# Altium PCB RV09-S_v2_PCB.PcbDoc
Units mm, origin at the board's own origin, x right, y up, seen from the top; angles counter-clockwise.
Board outline 22.5 x 38.5 mm, 2 copper layers (Top Layer, Bottom Layer), stack 1.571 mm thick; 10 components, 7 nets, 32 pads, 1 vias.
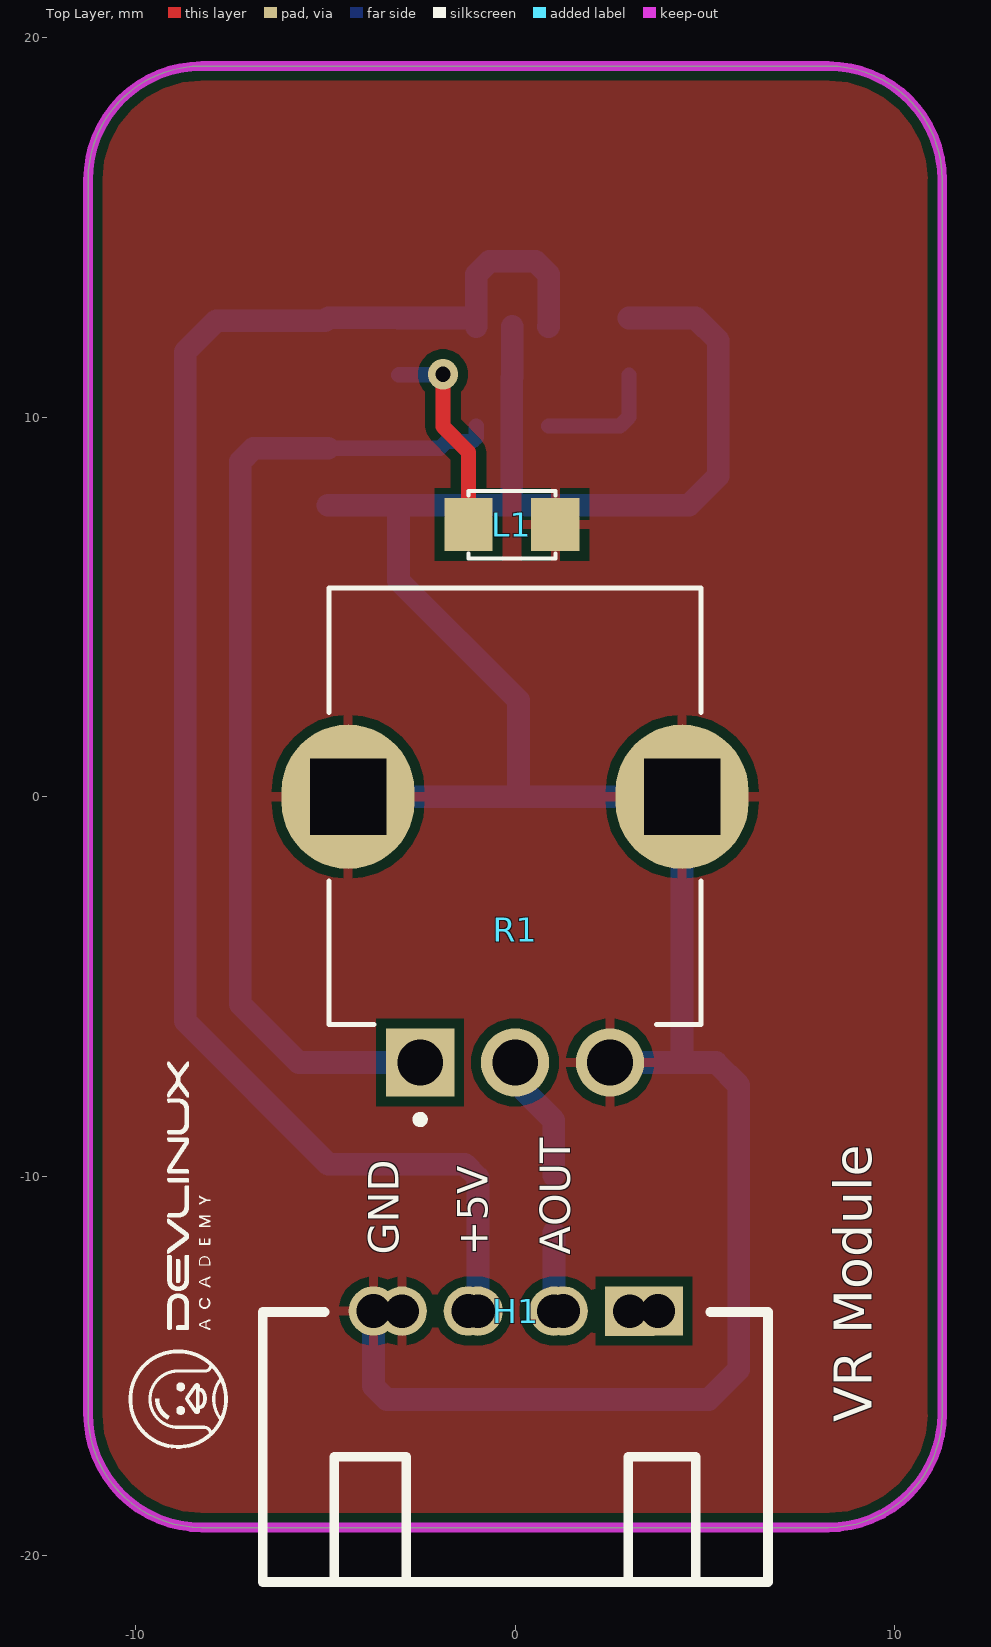
[diagram p0: Top Layer view]
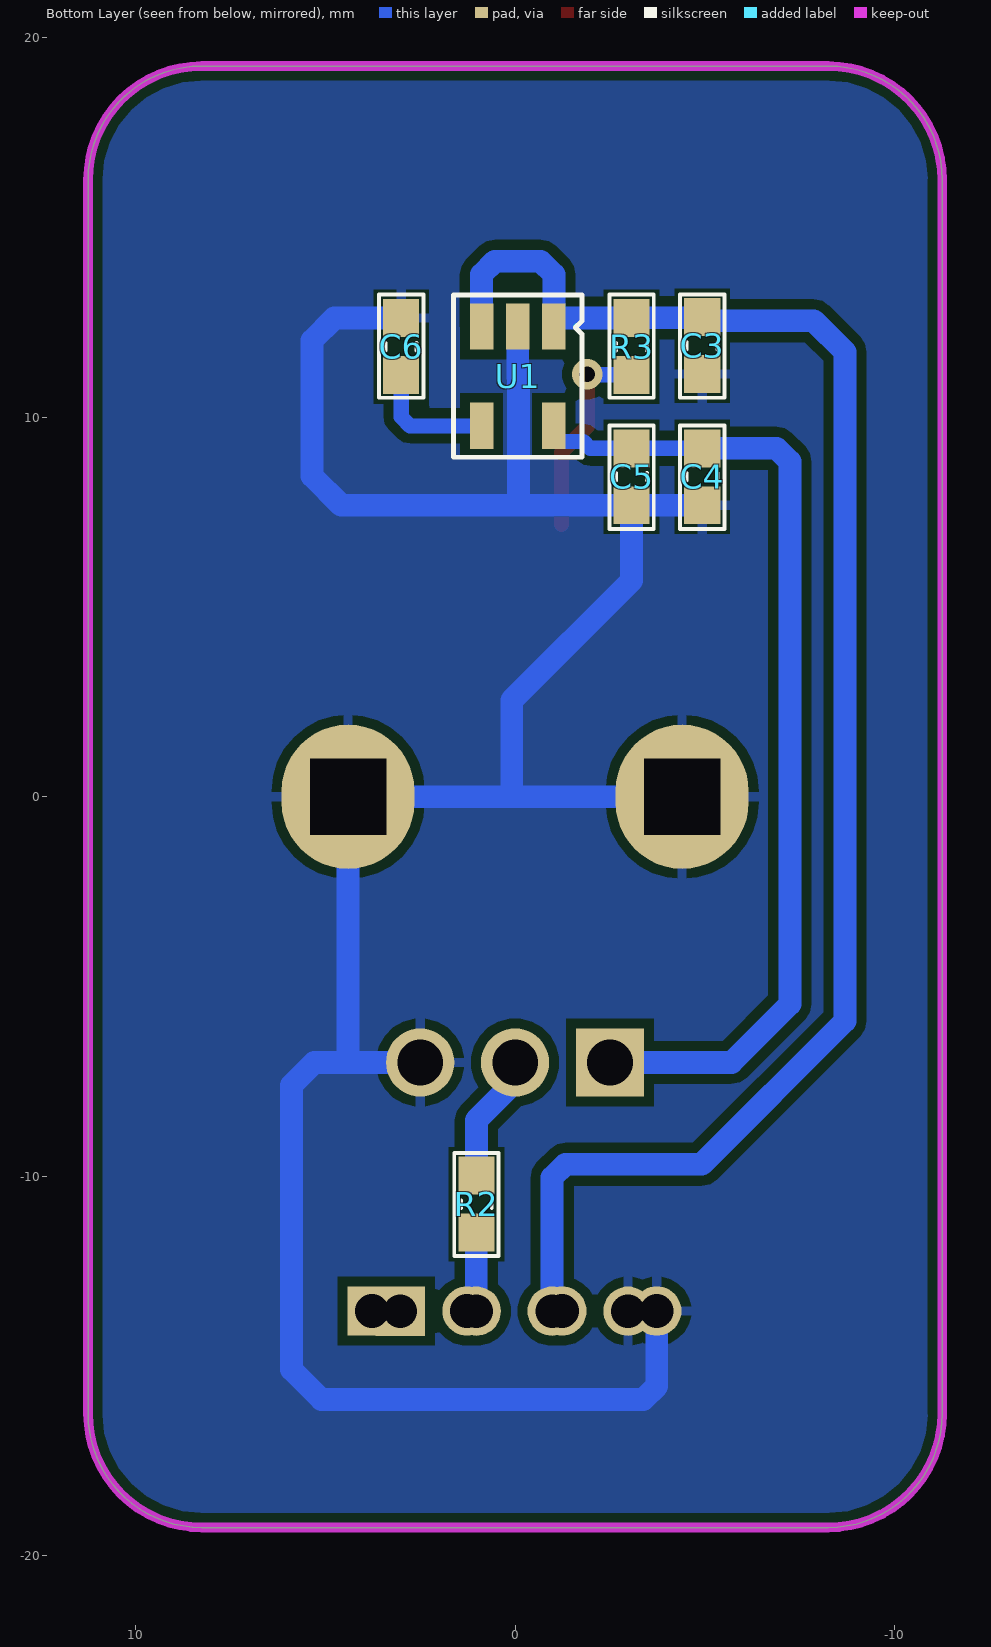
[diagram p1: Bottom Layer view, seen from below]
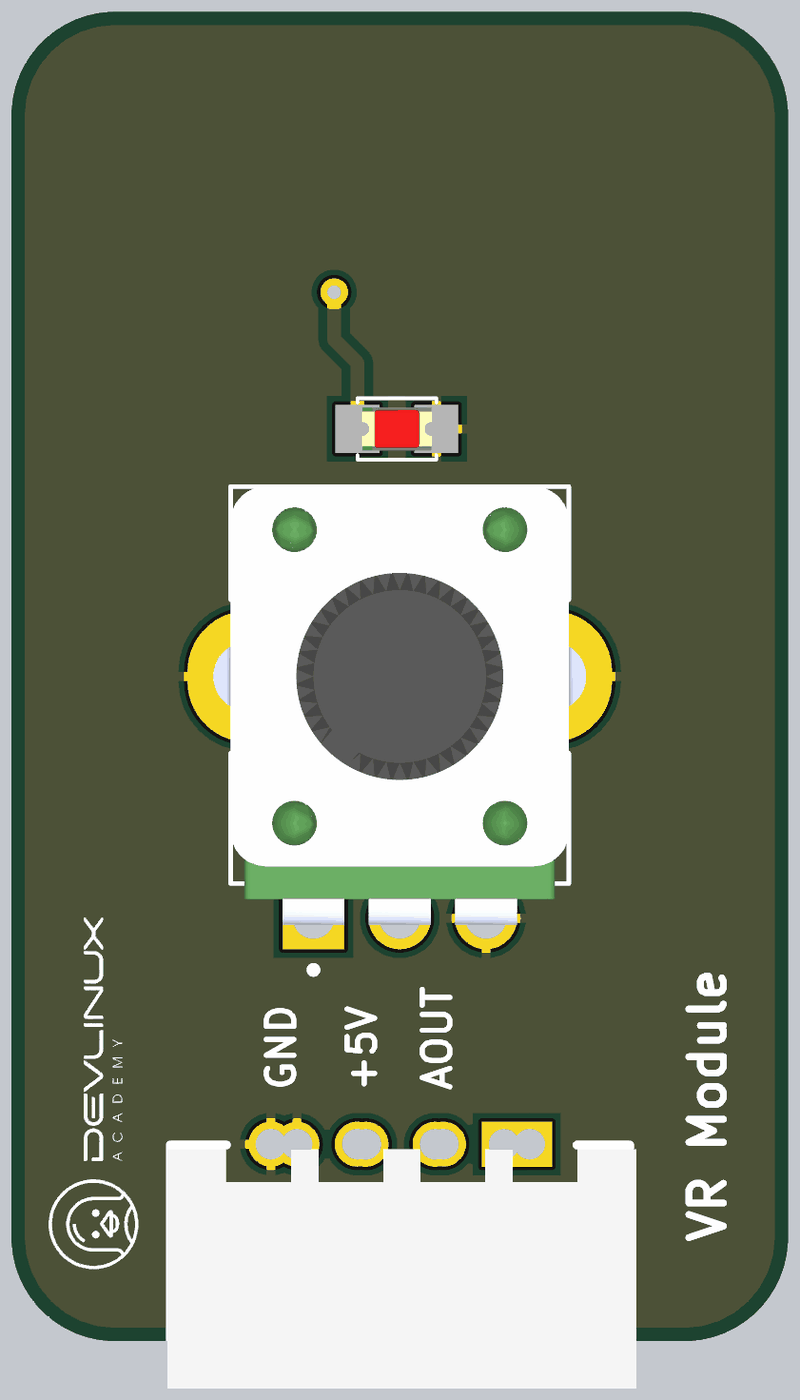
[diagram p2: 3D render of the assembled board from above, using the file's embedded part models]
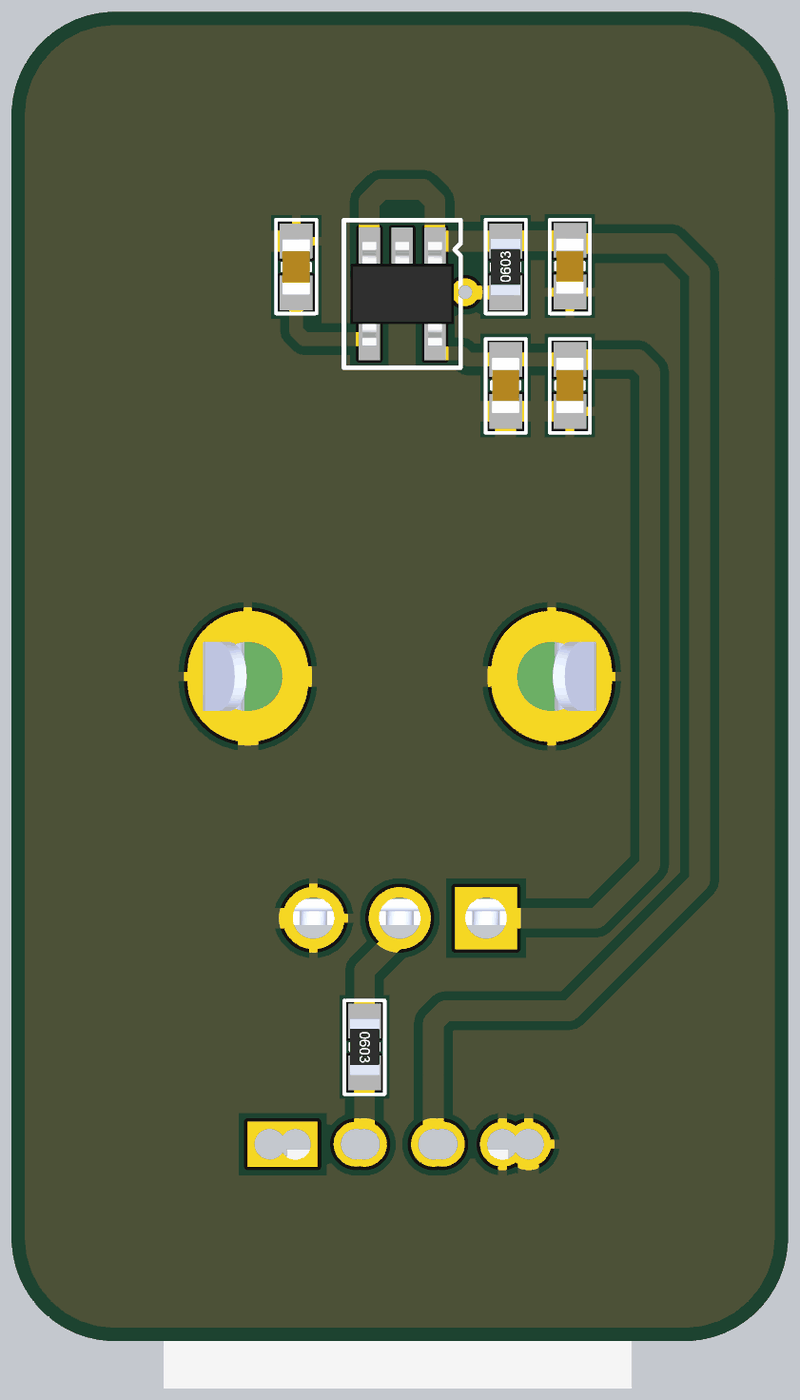
[diagram p3: 3D render of the assembled board from below, using the file's embedded part models]

## Layer stack, top to bottom
Top Solder: solder mask 0.0102, Solder Resist, Dk 3.5
Top Layer: signal copper 0.0356
Dielectric 1: dielectric 1.5, FR-4, Dk 4.8
Bottom Layer: signal copper 0.0356
Bottom Solder: solder mask 0.0102, Solder Resist, Dk 3.5

## Board outline
-11.25,-16.25 -11.25,16.25 cw(c-8.25,16.25) -8.25,19.25 8.25,19.25 cw(c8.25,16.25) 11.25,16.25 11.25,-16.25 cw(c8.25,-16.25) 8.25,-19.25 -8.25,-19.25 cw(c-8.25,-16.25)

## Design rules (kind name [scope] priority, off if disabled: settings)
Clearance [All] p1: gap=0.254 ignorepadtopadclearanceinfootprint=FALSE except(0: Arc-Hole Track-Hole SMDPad-Hole THPad-Hole Via-Hole Fill-Hole Poly-Hole Region-Hole Text-Hole)
PolygonConnect [All] p1: connectstyle=Relief reliefconductorwidth=0.254 reliefentries=4 polygonreliefangle="90 Angle" airgapwidth=0.254
RoomDefinition RV09-S_v2_SCH [InComponentClass('RV09-S_v2_SCH')] p1: confinementstyle=ConfineIn formatcopy=TRUE lockcomponents=FALSE outline 12.929,-48.97 57.125,-48.97 57.125,-17.855 12.929,-17.855
RoutingVias [All] p1: holewidth=0.4 width=0.8 viastyle="Through Hole" minholewidth=0.3 minwidth=0.6 maxholewidth=0.5 maxwidth=1
SolderMaskExpansion [All] p1: expansion=0.102 istentingtop=FALSE
Width [All] p1: maxlimit=0.6 minlimit=0.254 preferedwidth=0.4
30 further rules are at their usual default settings.

## Components (designator, comment, footprint, x,y, rotation, side; value= is the part's Value field where it differs from the comment)
C3 "100nF" "tu 0603" -4.93,11.884 r270 bottom
C4 "10uF" "tu 0603" -4.93,8.43 r270 bottom
C5 "100nF" "tu 0603" -3.07,8.43 r270 bottom
C6 "22nF" "tu 0603" 3,11.859 r90 bottom
H1 "Header 4P 2.54 + 2.0 Duc Cong" "Header 4P DC 2.54 + 2.0" 3.742,-13.572 r270 top
L1 "LED RED" LED-0805-Red -1.226,7.17 r0 top
R1 "RV09-S 10k" TRIM_RV09AF-40-20K-A10K 0,0 r0 top
R2 "1K" "tro smd 0603" 1.02,-10.73 r270 bottom
R3 "1k" "tro smd 0603" -3.07,11.859 r90 bottom
U1 "RT9193-33GB" SOT23-5 -0.07,11.08 r0 bottom

## Footprints (in the part's own frame and the unit in brackets; to place one, negate y for a bottom-side part, rotate by r counter-clockwise, add the part's x,y. Pads: shape width x height; smd on the part's side, far side on the other; paste and mask are expansions set on the pad)
"Header 4P DC 2.54 + 2.0" [mm]
  rect 1.3x1.3 hole 0.889: 1(-0.025,0.025) 1(-0.022,-0.719)
  round 1.3 hole 0.889: 2(-0.025,-2.475) 2(-0.022,-2.719) 3(-0.025,-4.975) 3(-0.022,-4.719) 4(-0.025,-7.475) 4(-0.022,-6.718)
  silkscreen extent 0,-10.39 7.11,2.92, body extent 0.13,-10.48 7.06,3.11, height 7.38
LED-0805-Red [mil]
  rect 50x55 smd: 1(0,0) 2(90,0)
  silkscreen extent 0,-35 90,35, body extent 5,-25 85,25, height 43
SOT23-5 [mm] "CASE: SOT"
  rect 0.62x1.22 smd mask+0.076: 1(-0.953,-1.31) 2(-0.003,-1.31) 3(0.947,-1.31) 4(0.952,1.31) 5(-0.953,1.31)
  silkscreen extent -1.69,-2.14 1.69,2.14, body extent -1.5,-1.5 1.5,1.5, height 1.41
TRIM_RV09AF-40-20K-A10K [mm]
  rect 1.8x1.8 / inner round 1.8 / far side rect 1.8x1.8 hole 1.2: 1(-2.5,-7)
  round 1.8 hole 1.2: 2(0,-7) 3(2.5,-7)
  oval 3.5x3.8 hole 2 square: SH1(-4.4,0) SH2(4.4,0)
  silkscreen extent -4.9,-8.6 4.9,5.5, body extent -5.7,-7.2 5.7,5.5, height 20
"tro smd 0603" [mm] "Chip Capacitor, 2-Leads, Body 1,60x0,80mm, IPC Medium Density"
  rect 1x0.95 smd mask+0.076: 1(-0.75,0) 2(0.75,0)
  silkscreen extent -1.35,-0.58 1.37,0.58, body extent -0.82,-0.42 0.82,0.43, height 0.44
"tu 0603" [mm] "Chip Capacitor, 2-Leads, Body 1,60x0,80mm, IPC Medium Density"
  rect 1x0.95 smd mask+0.076: 1(-0.75,0) 2(0.75,0)
  silkscreen extent -1.35,-0.58 1.37,0.58, body extent -0.8,-0.4 0.8,0.4, height 0.9

## Part data
C3 C5 C6: library part "Tu 0603 104 50V 10%", "Dán", Chung_Loai=Dán, Don_Vi=Con, Ma_Hang=MH004568, So_Chan=2, Ten_Linh_Kien="Tụ 0603 104-100nF 10% 50V"
C4: library part "Tu 0603 106 16V 20%", "Dán", Chung_Loai=Dán, Don_Vi=Con, Ma_Hang=MH004848, So_Chan=2, Ten_Linh_Kien="Tụ 0603-10uF 20% 16V"
H1: "Cắm", Chung_Loai=Cắm, Don_Vi=Con, Ma_Hang=MH001310, Ten_Linh_Kien="Header 4P XH2.54-4P Đực Cong"
L1: library part "LED 0805 Do", "Dán", Chung_Loai=Dán, Don_Vi=Con, Ma_Hang=MH000897, Ten_Linh_Kien="LED 0805 Màu Đỏ (Red)"
R1: Package=None, Check_prices=https://www.snapeda.com/parts/RV09AF-40-20K-A10K/Alpha/view-part/?ref=eda, MF="Alpha Taiwan", MP=RV09AF-40-20K-A10K, SnapEDA_Link=https://www.snapeda.com/parts/RV09AF-40-20K-A10K/Alpha/view-part/?ref=snap
R2: library part "Tro 0603 1% 10k", "Dán", Chung_Loai=Dán, Don_Vi=Con, Ma_Hang=MH006333, So_Chan=2, Ten_Linh_Kien="Trở 0603 1% 10k"
R3: library part "Tro 0603 1% 1k", "Dán", Chung_Loai=Dán, Don_Vi=Con, Ma_Hang=MH006334, So_Chan=2, Ten_Linh_Kien="Trở 0603 1% 1k"
U1: library part REG_5.5V-3.3V-0.3A-1W-SOT-23-5, "Linear Voltage Regulator IC 1 Output 300mA SOT-23-5", Alternate Part Number-1=NA, Case/Package=SOT-23-5, Manufacturer="Richtek USA Inc.", Supplier Part Number-1=C15651, Manufacturer Part Number=RT9193-33GB, Supplier-1=LCSC

## Via types
v1: diameter 0.8, hole 0.4, Top Layer to Bottom Layer, 1 vias

## Nets (pads, with @x,y where several pads share a name; then routed paths per layer and width w, separated by ;. In a path a pad name is that pad's centre, name@x,y a point inside that pad or via, vN(x,y) a via of type N, cw(c..) or ccw(c..) an arc to the next point about the centre after c; other vN are vias at no path point)
+3V3: C4.1 C5.1 R1.1 U1.5 | length 26.4
  Bottom Layer w0.4: C4.1 C5.1 -1.98,9.18 -1.8,9.36 -1.133,9.36 -1.023,9.47 U1.5
  Bottom Layer w0.6: C4.1 -6.889,9.18 -7.24,8.829 -7.24,-5.46 -5.7,-7 R1.1
+5: C3.1 H1.3 R3.2 U1.1 U1.3 | length 43.6
  Bottom Layer w0.6: U1.1 U1.1@-1.023,12.599 ; H1.3@-0.974,-13.553 -0.974,-10.031 -1.326,-9.68 -4.92,-9.68 -8.69,-5.91 -8.69,11.72 -7.87,12.54 -4.999,12.54 -4.917,12.621 -3.083,12.621 R3.2 -1.033,12.609 U1.1@-1.023,12.599 ; U1.3 0.887,12.4 0.887,13.759 0.536,14.11 -0.671,14.11 -1.023,13.759 U1.1@-1.023,12.599
A_OUT: H1.2 R2.2 | length 2.1
  Bottom Layer w0.6: R2.2 1.023,-11.483 1.023,-13.55 H1.2@1.026,-13.553
GND: C3.2 C4.2 C5.2 C6.2 H1.4 L1.2 R1.3 R1.SH1 R1.SH2 U1.2 | length 70.3
  Bottom Layer w0.6: C4.2 C5.2 ; R1.SH1 0,0 ; H1.4@-2.974,-13.553 -3.73,-13.553 -3.73,-15.529 -3.379,-15.88 5.1,-15.88 5.89,-15.09 5.89,-7.6 5.29,-7 4.4,-7 ; U1.2 -0.073,11.057 -0.09,11.04 -0.09,7.73 -0.14,7.68 ; R1.3 4.4,-7 ; C6.2 4.761,12.609 5.35,12.02 5.35,8.45 4.58,7.68 -0.14,7.68 ; C5.2 -0.14,7.68 ; C5.2 -3.07,5.7 0.09,2.54 0.09,0.09 0,0 ; 0,0 R1.SH2 4.4,-7
NetC6_1: C6.1 U1.4 | length 3.3
  Bottom Layer w0.4: U1.4 2.766,9.77 3,10.004 C6.1
NetL1_1: L1.1 R3.1 | length 5.4
  Top Layer w0.4: v1(-1.9,11.13) -1.9,9.75 -1.226,9.076 L1.1
  Bottom Layer w0.4: R3.1 -3.059,11.119 -1.911,11.119 v1(-1.9,11.13)
NetR1_2: R1.2 R2.1 | length 3.4
  Bottom Layer w0.6: R1.2 0.23,-7.23 0.23,-7.73 1.02,-8.52 R2.1
pads on no net: H1.1

## Polygon pours and split planes (outlines as drawn)
GND on Top Layer "NONET_L-01_P-001" (solid, remove dead copper, pour order 0): -11.58,21.08 -11.37,21.29 12.74,21.29 12.74,-21.46 11.84,-22.36 10.72,-21.24 -13.45,-21.24
GND on Bottom Layer "NONET_L-01_P-001" (solid, remove dead copper, pour order 1): -11.93,21.15 12.47,21.15 12.54,21.22 12.95,20.81 12.95,-20.62 -11.58,-20.62 -12.27,-21.31

## Keep-outs
Keep-Out Layer:
  the board outline again, w0.254

## Silkscreen, mask and mechanical layers (free items; w line width, h text height)
Top Overlay:
  drawing of 21 lines, arcs and shapes, not listed
  text "GND" at -3.06,-12.061 h0.8 r90
  text "AOUT" at 1.46,-12.061 h0.8 r90
  text "+5V" at -0.72,-12.091 h0.8 r90
  text "VR Module" at 9.39,-16.48 h1 r90